# Altium PCB PCB.PcbDoc
Units mm, origin at the board's own origin, x right, y up, seen from the top; angles counter-clockwise.
Board outline 35 x 20 mm, 2 copper layers (Top Layer, Bottom Layer); 17 components, 11 nets, 41 pads, 4 vias.
Unrouted connection lines stored in the file: 4.
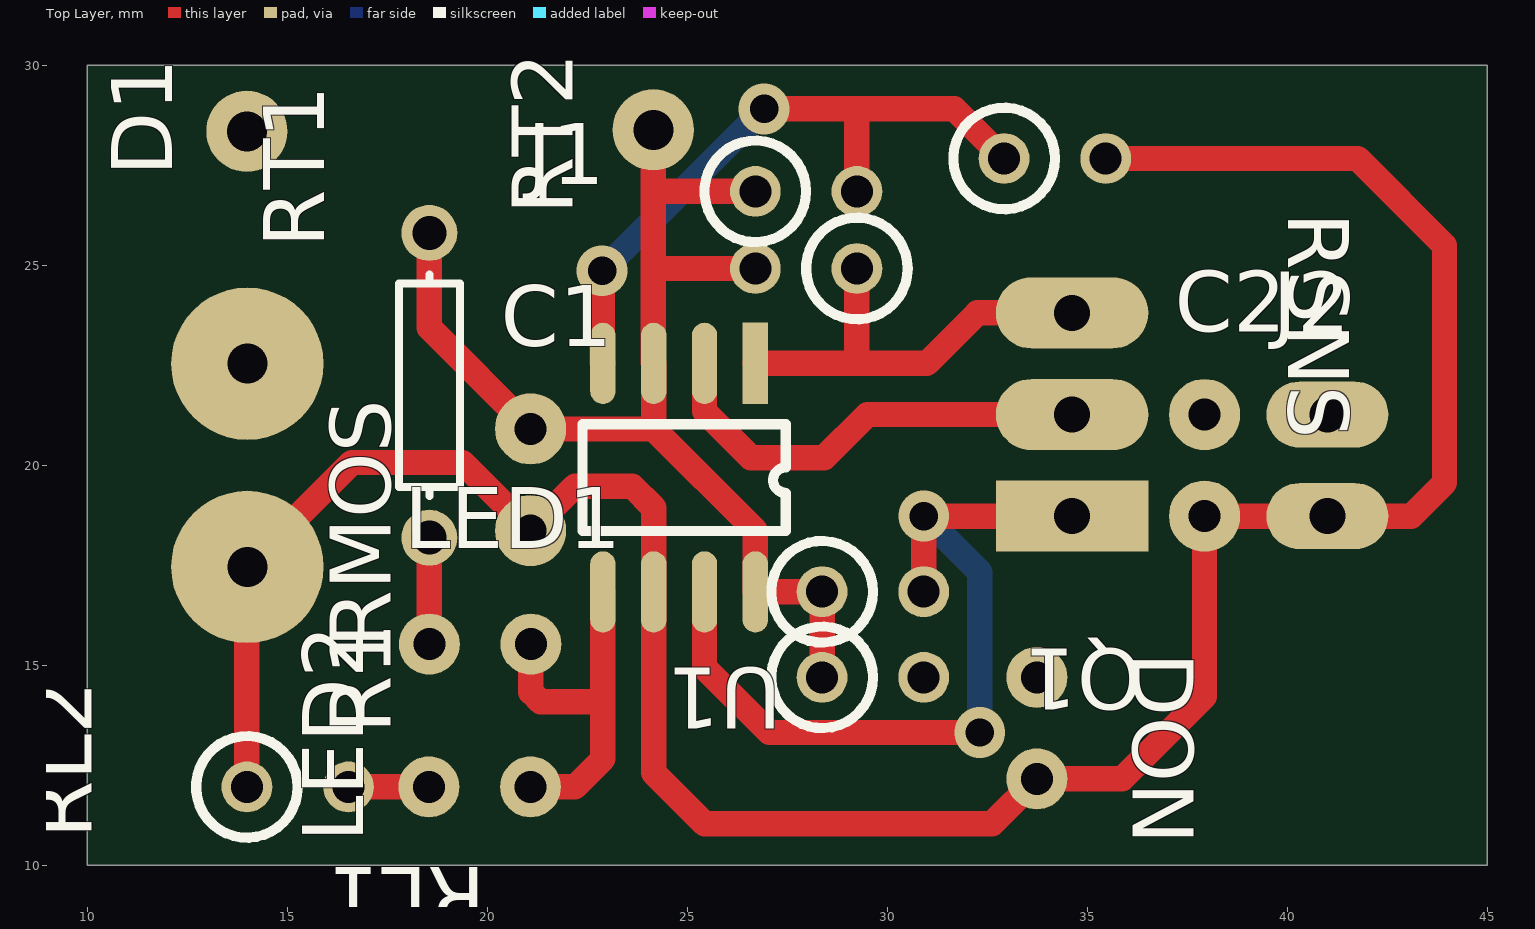
[diagram p0: Top Layer view]
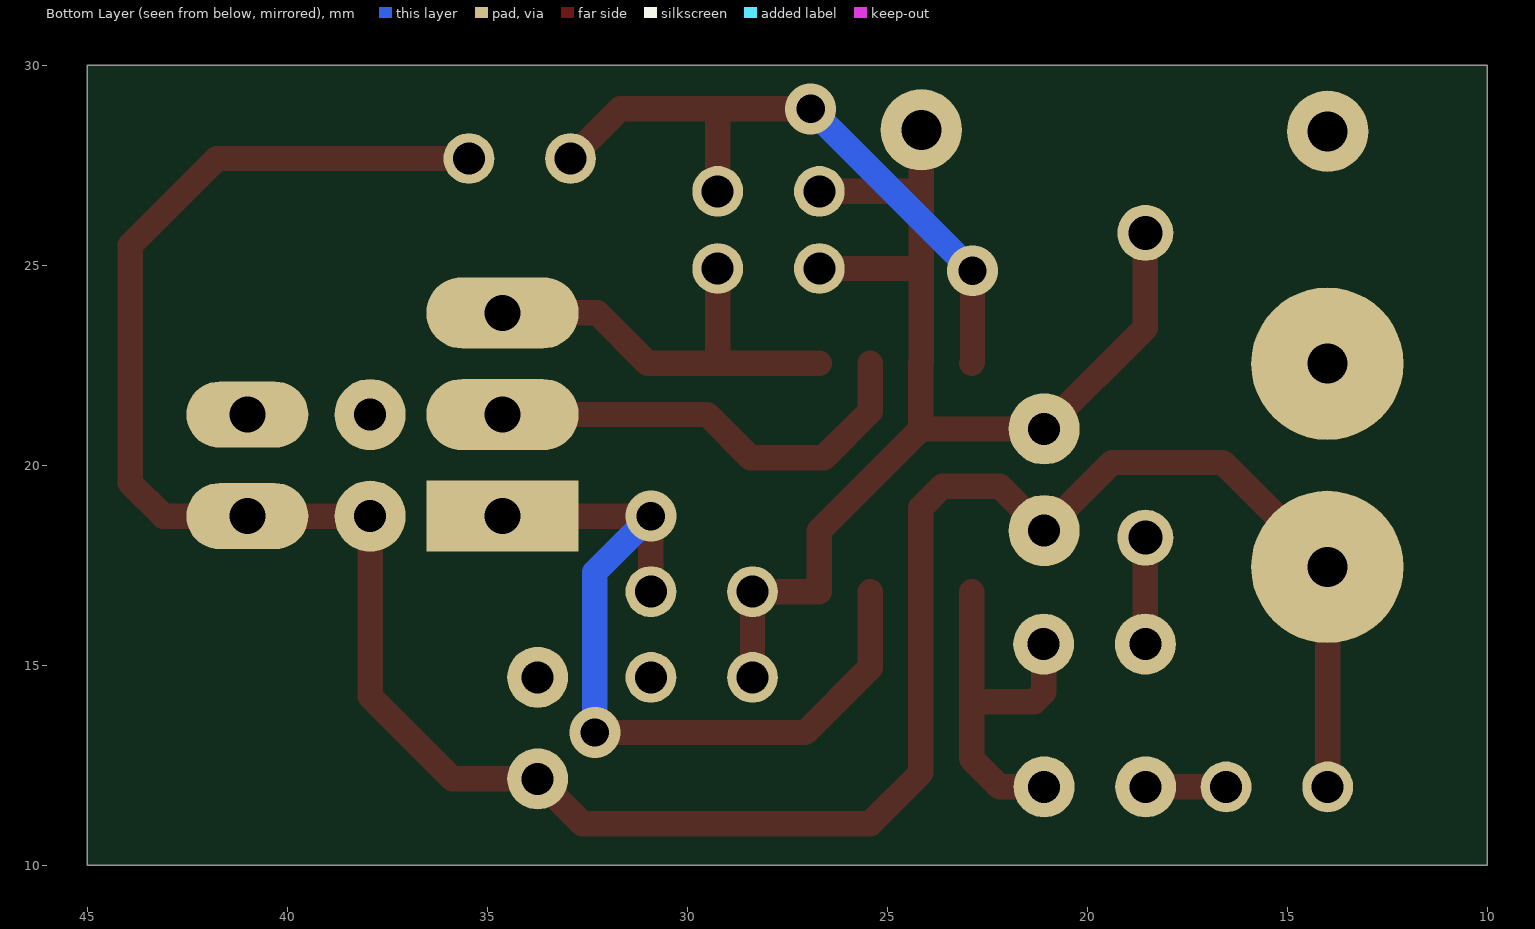
[diagram p1: Bottom Layer view, seen from below]
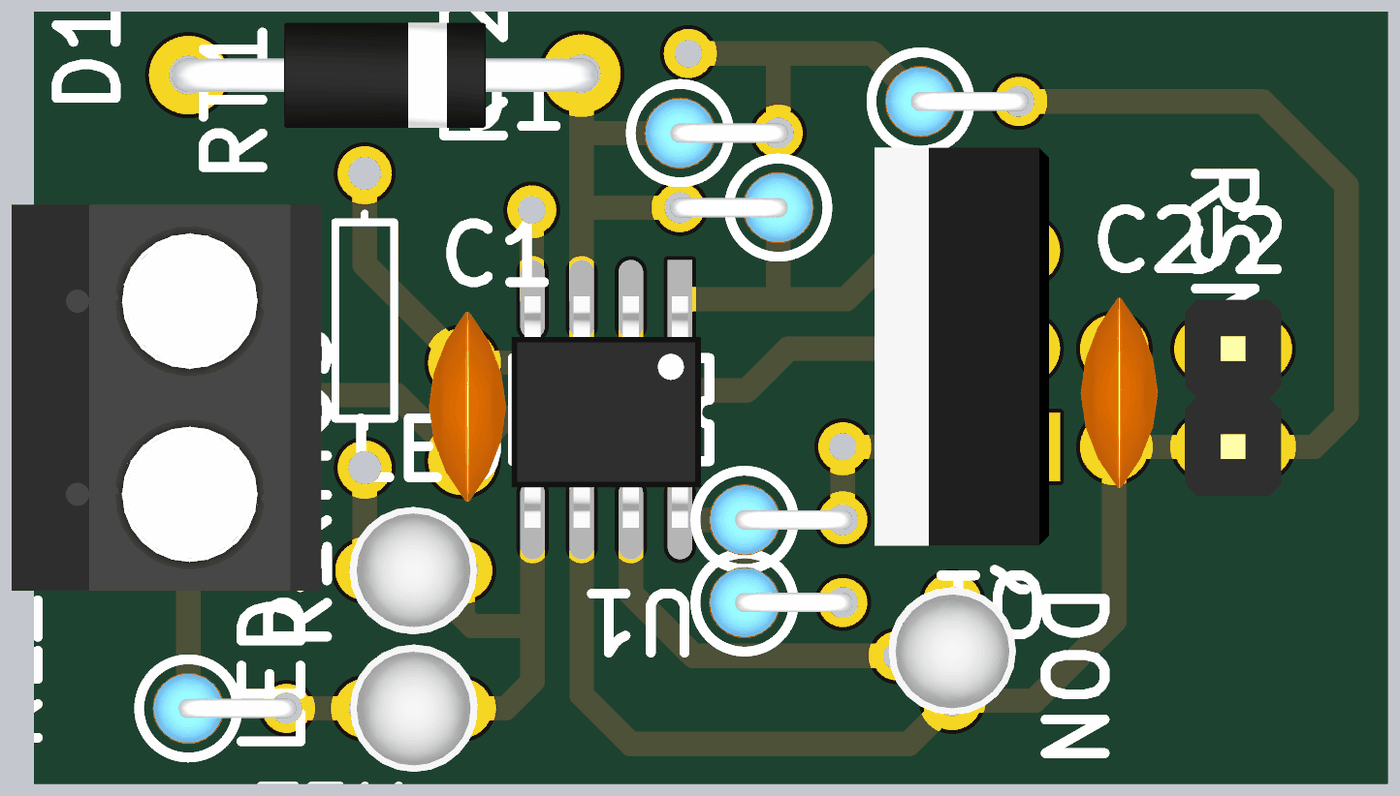
[diagram p2: 3D render of the assembled board from above, using the file's embedded part models]

## Layer stack, top to bottom
Top Solder: solder mask 0.0102, Solder Resist, Dk 3.5
Top Layer: signal copper 0.0356
Dielectric 1: dielectric 0.32, FR-4, Dk 4.8
Bottom Layer: signal copper 0.0356
Bottom Solder: solder mask 0.0102, Solder Resist, Dk 3.5

## Board outline
10,10 10,30 45,30 45,10

## Design rules (kind name [scope] priority, off if disabled: settings)
Clearance [All] p1: gap=0.254
PolygonConnect [All] p1: connectstyle=Relief reliefconductorwidth=0.254 reliefentries=4 polygonreliefangle="90 Angle" airgapwidth=0.254
RoutingVias [All] p1: holewidth=0.711 width=1.27 viastyle="Through Hole" minholewidth=0.711 minwidth=1.27 maxholewidth=0.711 maxwidth=1.27
SolderMaskExpansion [All] p1: expansion=0.102
Width [All] p1: maxlimit=0.635 minlimit=0.254 preferedwidth=0.635
30 further rules are at their usual default settings.

## Components (designator, comment, footprint, x,y, rotation, side; value= is the part's Value field where it differs from the comment)
C1 "CAP-CER" CAP-CER 21.08,20.02 r90 top
C2 "CAP-CER" CAP-CER 37.93,20.381 r90 top
D1 "1N5819" DO-41 19.705,28.387 r180 top
DON "LED" LED-3MM-RED 33.74,13.43 r270 top
J1 "Tension USB" BLOCK_TERMINAL-2 14,20 r0 top
J2 "Bateria" "HEADER 1x2" 41,20 r0 top
LED1 "LED" LED-3MM-GREEN 19.82,15.53 r0 top
LED2 "LED" LED-3MM-RED 19.81,11.96 r180 top
Q1 "IRF4905" TO-220 34.62,18.73 r180 top
R1 "RES" "RES VERTICAL" 29.64,14.7 r180 top
RL1 "RES" AXIAL-0.3 18.55,22 r270 top
RL2 "RES" "RES VERTICAL" 15.26,11.96 r180 top
RMOS "RES" "RES VERTICAL" 29.64,16.84 r180 top
RSNS "RES" "RES VERTICAL" 27.97,24.92 r0 top
RT1 "RES" "RES VERTICAL" 27.97,26.85 r180 top
RT2 "RES" "RES VERTICAL" 34.19,27.67 r180 top
U1 "BQ2057CSN" SOIC-8 26.7,28.011 r270 top

## Footprints (in the part's own frame and the unit in brackets; to place one, negate y for a bottom-side part, rotate by r counter-clockwise, add the part's x,y. Pads: shape width x height; smd on the part's side, far side on the other; paste and mask are expansions set on the pad)
AXIAL-0.3 [mm] "Axial Device, Thru-Hole; 2 Leads; 0.3 in Pin Spacing"
  round 1.4 hole 0.85: 1(-3.81,0) 2(3.81,0)
  silkscreen extent -2.77,-0.76 2.77,0.76
BLOCK_TERMINAL-2 [mm]
  round 3.81 hole 1: 1(0,2.54) 2(0,-2.54)
  body extent -4.57,-5 3.43,5, height 10.16
CAP-CER [mil]
  round 70 hole 31.5: 1(-65,0) 2(35,0)
  body extent -107,-44 87,34, height 207
DO-41 [mil]
  round 80 hole 39.37: A(224.99,1.45) K(-175,0)
  body extent -192,-52 242,55, height 107
"HEADER 1x2" [mil]
  oval 120x65 hole 35.43: 1(0,50) 2(0,-50)
  body extent -49,-100 49,100, height 336
LED-3MM-GREEN [mil]
  round 60 hole 31.5: A(-50,0) K(50,0)
  body extent -66,-65 64,65, height 217
LED-3MM-RED [mil]
  round 60 hole 31.5: A(-50,0) K(50,0)
  body extent -66,-65 64,65, height 217
"RES VERTICAL" [mm]
  round 1.27 hole 0.8: 1(-1.27,0) 2(1.27,0)
  silkscreen extent 0,-1.27 2.54,1.27, body extent -1.52,-0.92 2.19,0.92, height 6.79
SOIC-8 [mil]
  rect 80x25 smd: 1(215,0)
  oval 80x25 smd: 2(215,-50) 3(215,-100) 4(215,-150) 5(440,-150) 6(440,-100) 7(440,-50) 8(440,0)
  silkscreen extent 275,-170 380,30, body extent 212,-171 448,21, height 69
TO-220 [mm]
  rect 3.81x1.778 hole 0.9: 1(0,0)
  oval 3.81x1.778 hole 0.9: 2(0,-2.54) 3(0,-5.08)
  body extent -1.61,-7.75 2.88,2.55, height 16.8

## Part data
D1: library part SCHOTTKY
J1: library part 2-BLOCK_TERMINAL
J2: library part "Header 1x2"
Q1: library part P-MOSFET
U1: library part BQ2057

## Via types
v1: diameter 1.27, hole 0.711, Top Layer to Bottom Layer, 4 vias

## Nets (pads, with @x,y where several pads share a name; then routed paths per layer and width w, separated by ;. In a path a pad name is that pad's centre, name@x,y a point inside that pad or via, vN(x,y) a via of type N, cw(c..) or ccw(c..) an arc to the next point about the centre after c; other vN are vias at no path point)
BAT: C2.2 J2.1 Q1.2 U1.2 | length 11.3
  Top Layer w0.635: U1.2 25.43,21.35 26.59,20.19 28.42,20.19 29.5,21.27 Q1.2
CC: Q1.1 RMOS.1 U1.7 | length 21.3
  Top Layer w0.635: U1.7 25.43,14.94 27.05,13.32 v1(32.31,13.32) ; RMOS.1 v1(30.91,18.73) Q1.1
  Bottom Layer w0.635: v1(30.91,18.73) 32.31,17.33 v1(32.31,13.32) v1@32.31,13.07
GND: C1.1 C2.1 DON.K J1.2 J2.2 RL2.2 RT2.1 U1.6 | length 66.5
  Top Layer w0.635: RL2.2 13.99,17.45 J1.2 16.61,20.07 19.379,20.07 C1.1 22.191,19.48 23.62,19.48 24.16,18.94 U1.6 24.16,12.31 25.43,11.04 32.62,11.04 DON.K 35.87,12.16 37.93,14.22 C2.1 J2.2 43.1,18.73 43.93,19.56 43.93,25.5 41.76,27.67 RT2.1
NetD1_A: D1.A J1.1
NetDON_A: DON.A R1.1
NetLED1_A: LED1.A RL1.2 | length 2.7
  Top Layer w0.635: LED1.A RL1.2
NetLED2_K: LED2.K RL2.1 | length 2
  Top Layer w0.635: RL2.1 LED2.K
SNS: Q1.3 RSNS.2 U1.1 | length 10.8
  Top Layer w0.635: U1.1 29.24,22.55 ; RSNS.2 29.24,22.55 ; Q1.3 32.25,23.81 30.99,22.55 29.24,22.55
STAT: LED1.K LED2.A U1.5 | length 9.4
  Top Layer w0.635: LED2.A 22.19,11.96 22.89,12.66 22.89,14.09 ; LED1.K 21.09,14.33 21.33,14.09 22.89,14.09 ; U1.5 22.89,14.09
TS: RT1.1 RT2.2 U1.4 | length 16.6
  Top Layer w0.635: v1(22.87,24.862) 22.87,22.57 U1.4 ; v1(26.918,28.91) 29.24,28.91 ; RT1.1 29.24,28.57 29.24,28.91 ; RT2.2 31.68,28.91 29.24,28.91
  Bottom Layer w0.635: v1(22.87,24.862) v1(26.918,28.91)
VCC: C1.2 D1.K R1.2 RL1.1 RMOS.2 RSNS.1 RT1.2 U1.3 U1.8 | length 30.5
  Top Layer w0.635: RL1.1 18.55,23.439 C1.2 24.16,20.909 ; D1.K 24.15,26.85 ; RSNS.1 24.15,24.92 ; RT1.2 24.15,26.85 ; R1.2 RMOS.2 28.365,16.835 U1.8 26.7,18.369 24.16,20.909 ; 24.15,24.92 24.15,22.56 U1.3 24.16,20.909 ; 24.15,24.92 24.15,26.85

## Silkscreen, mask and mechanical layers (free items; w line width, h text height)
Mechanical 1:
  the board outline again, w0.254